# Altium PCB ESP32_Component.PcbDoc (part 1 of 2)
Units mm, origin at the board's own origin, x right, y up, seen from the top; angles counter-clockwise.
Board outline 90.17 x 95.89 mm, 4 copper layers (L1 (Signal), L2 (Ground), L3 (Ground), L4 (Signal)), stack 1.591 mm thick; 69 components, 61 nets, 348 pads, 1237 vias.
Unrouted connection lines stored in the file: 1.
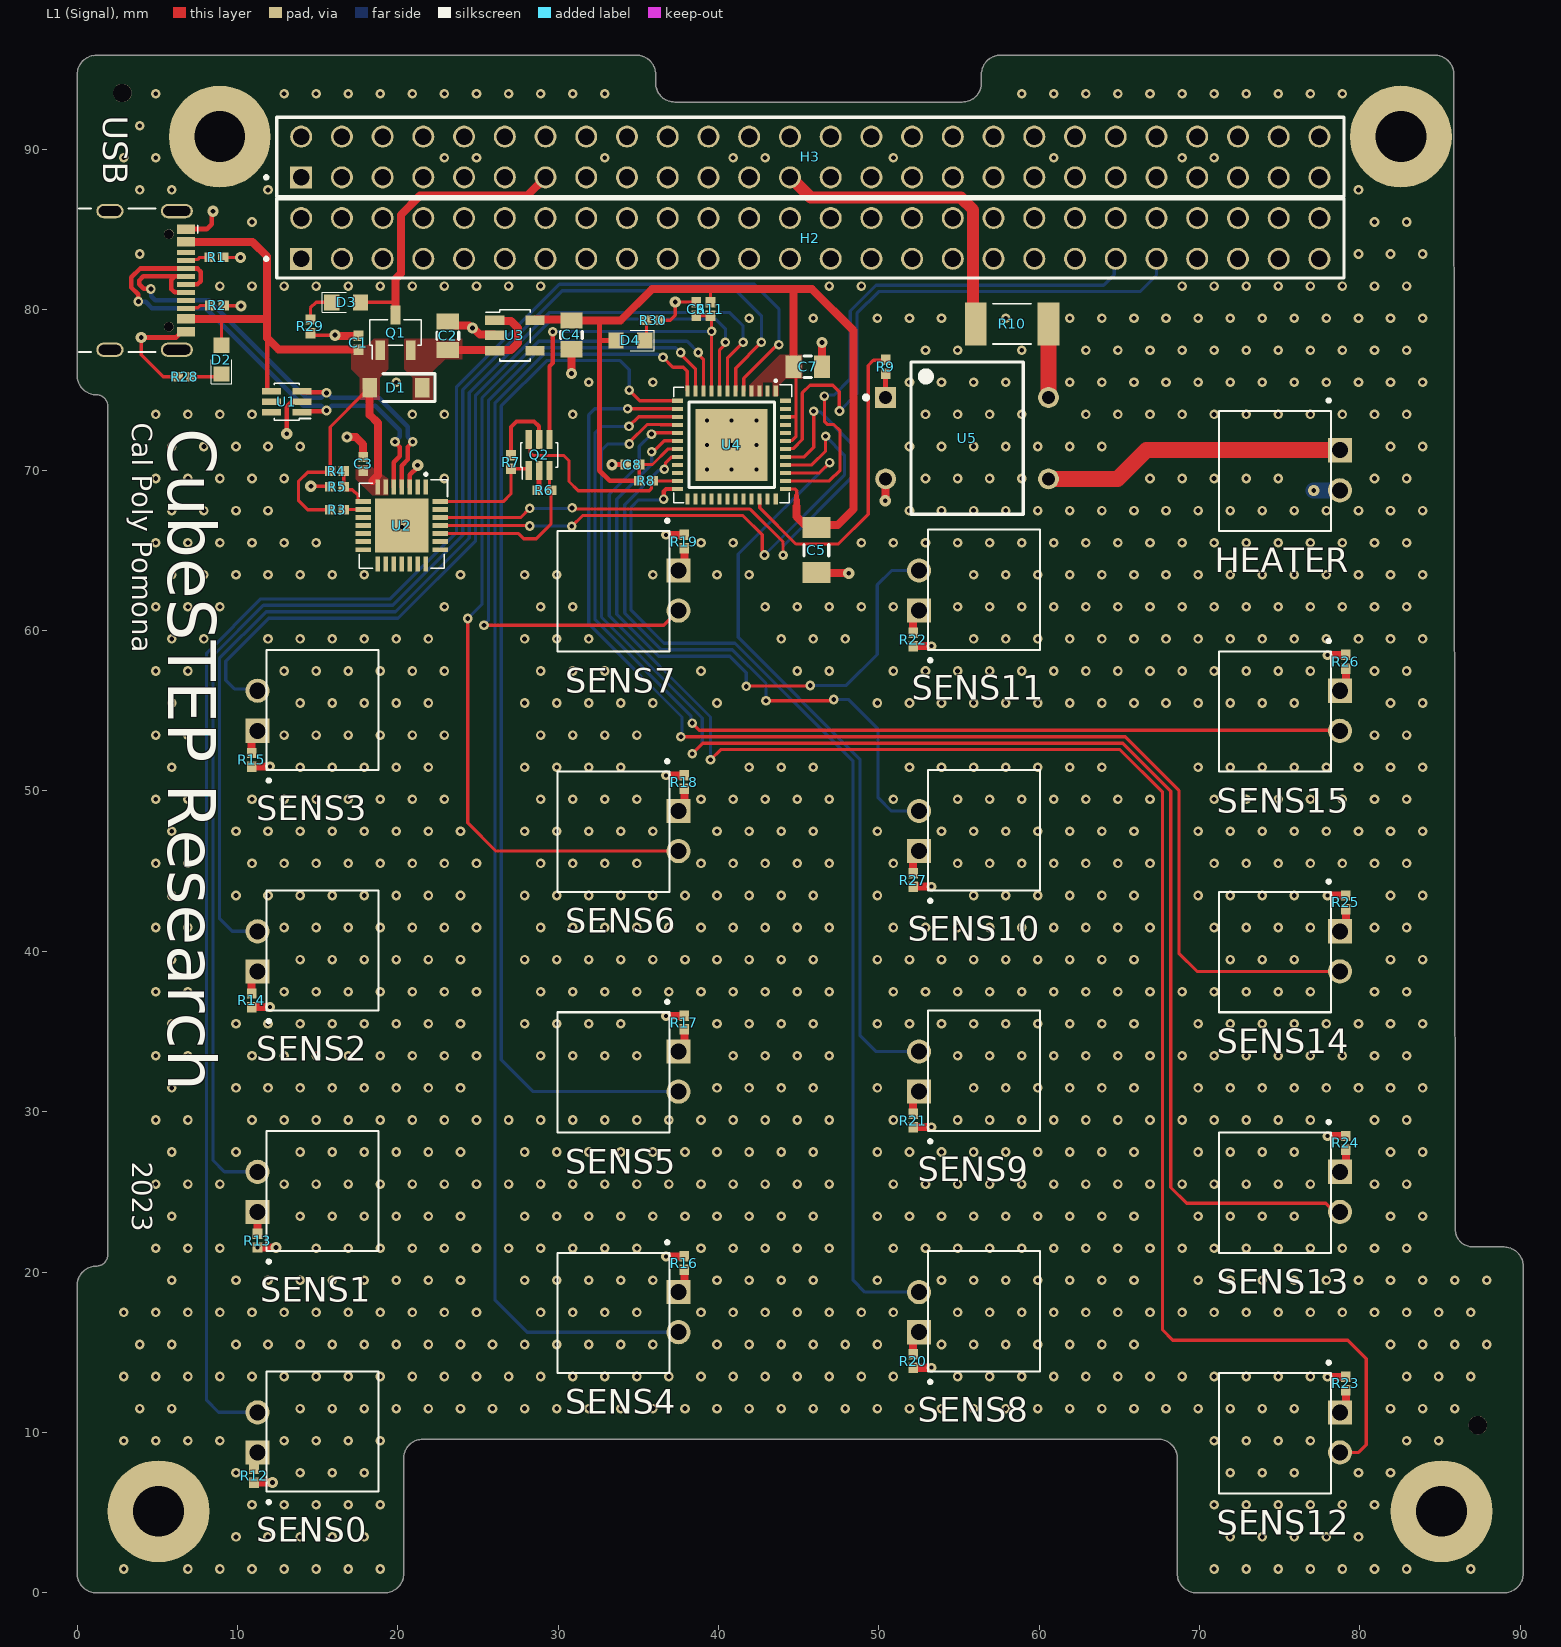
[diagram p0: L1 (Signal) view]
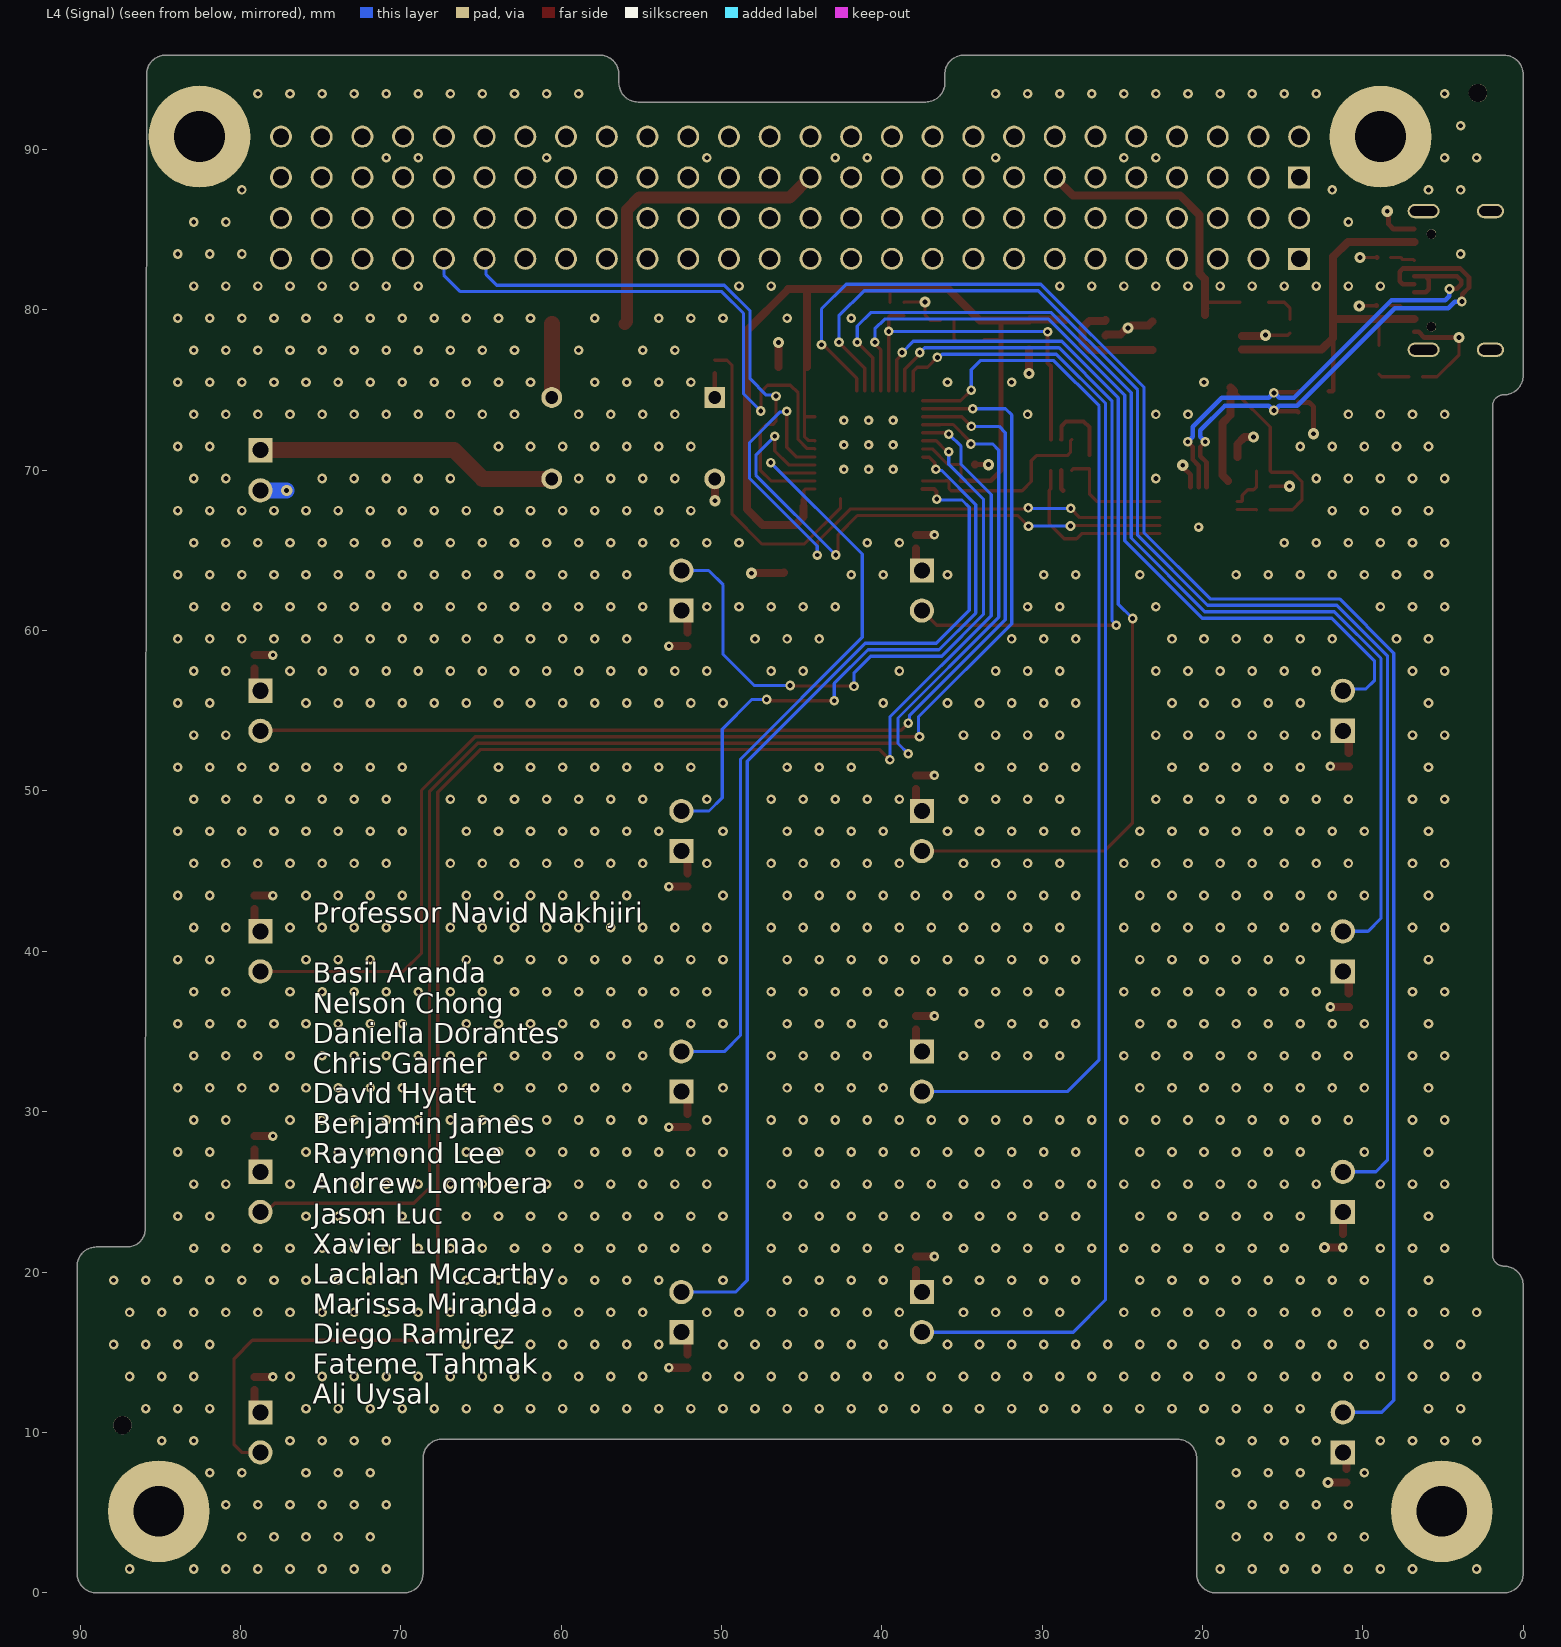
[diagram p1: L4 (Signal) view, seen from below]
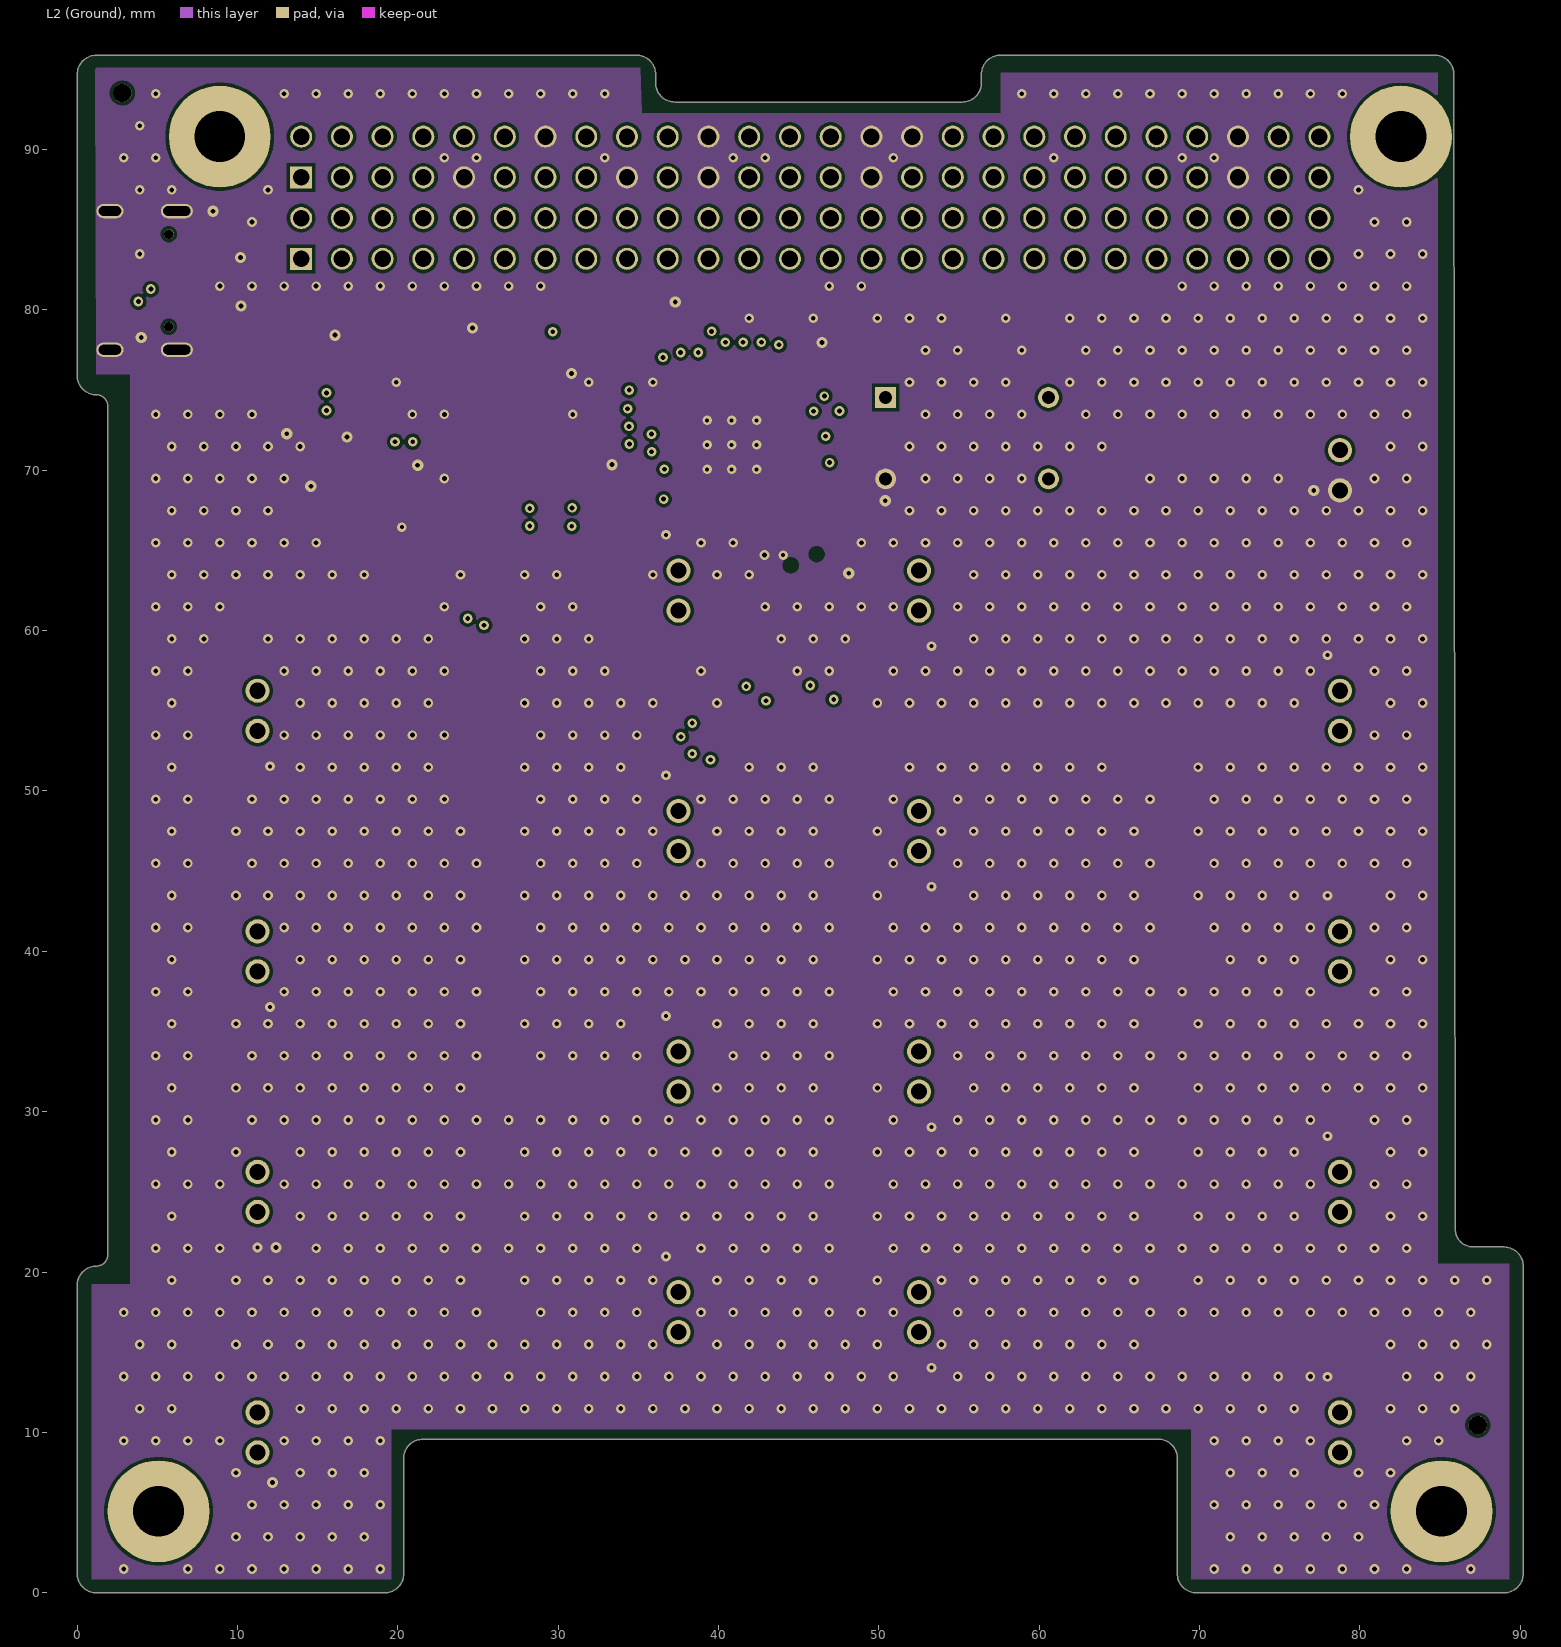
[diagram p2: L2 (Ground)]
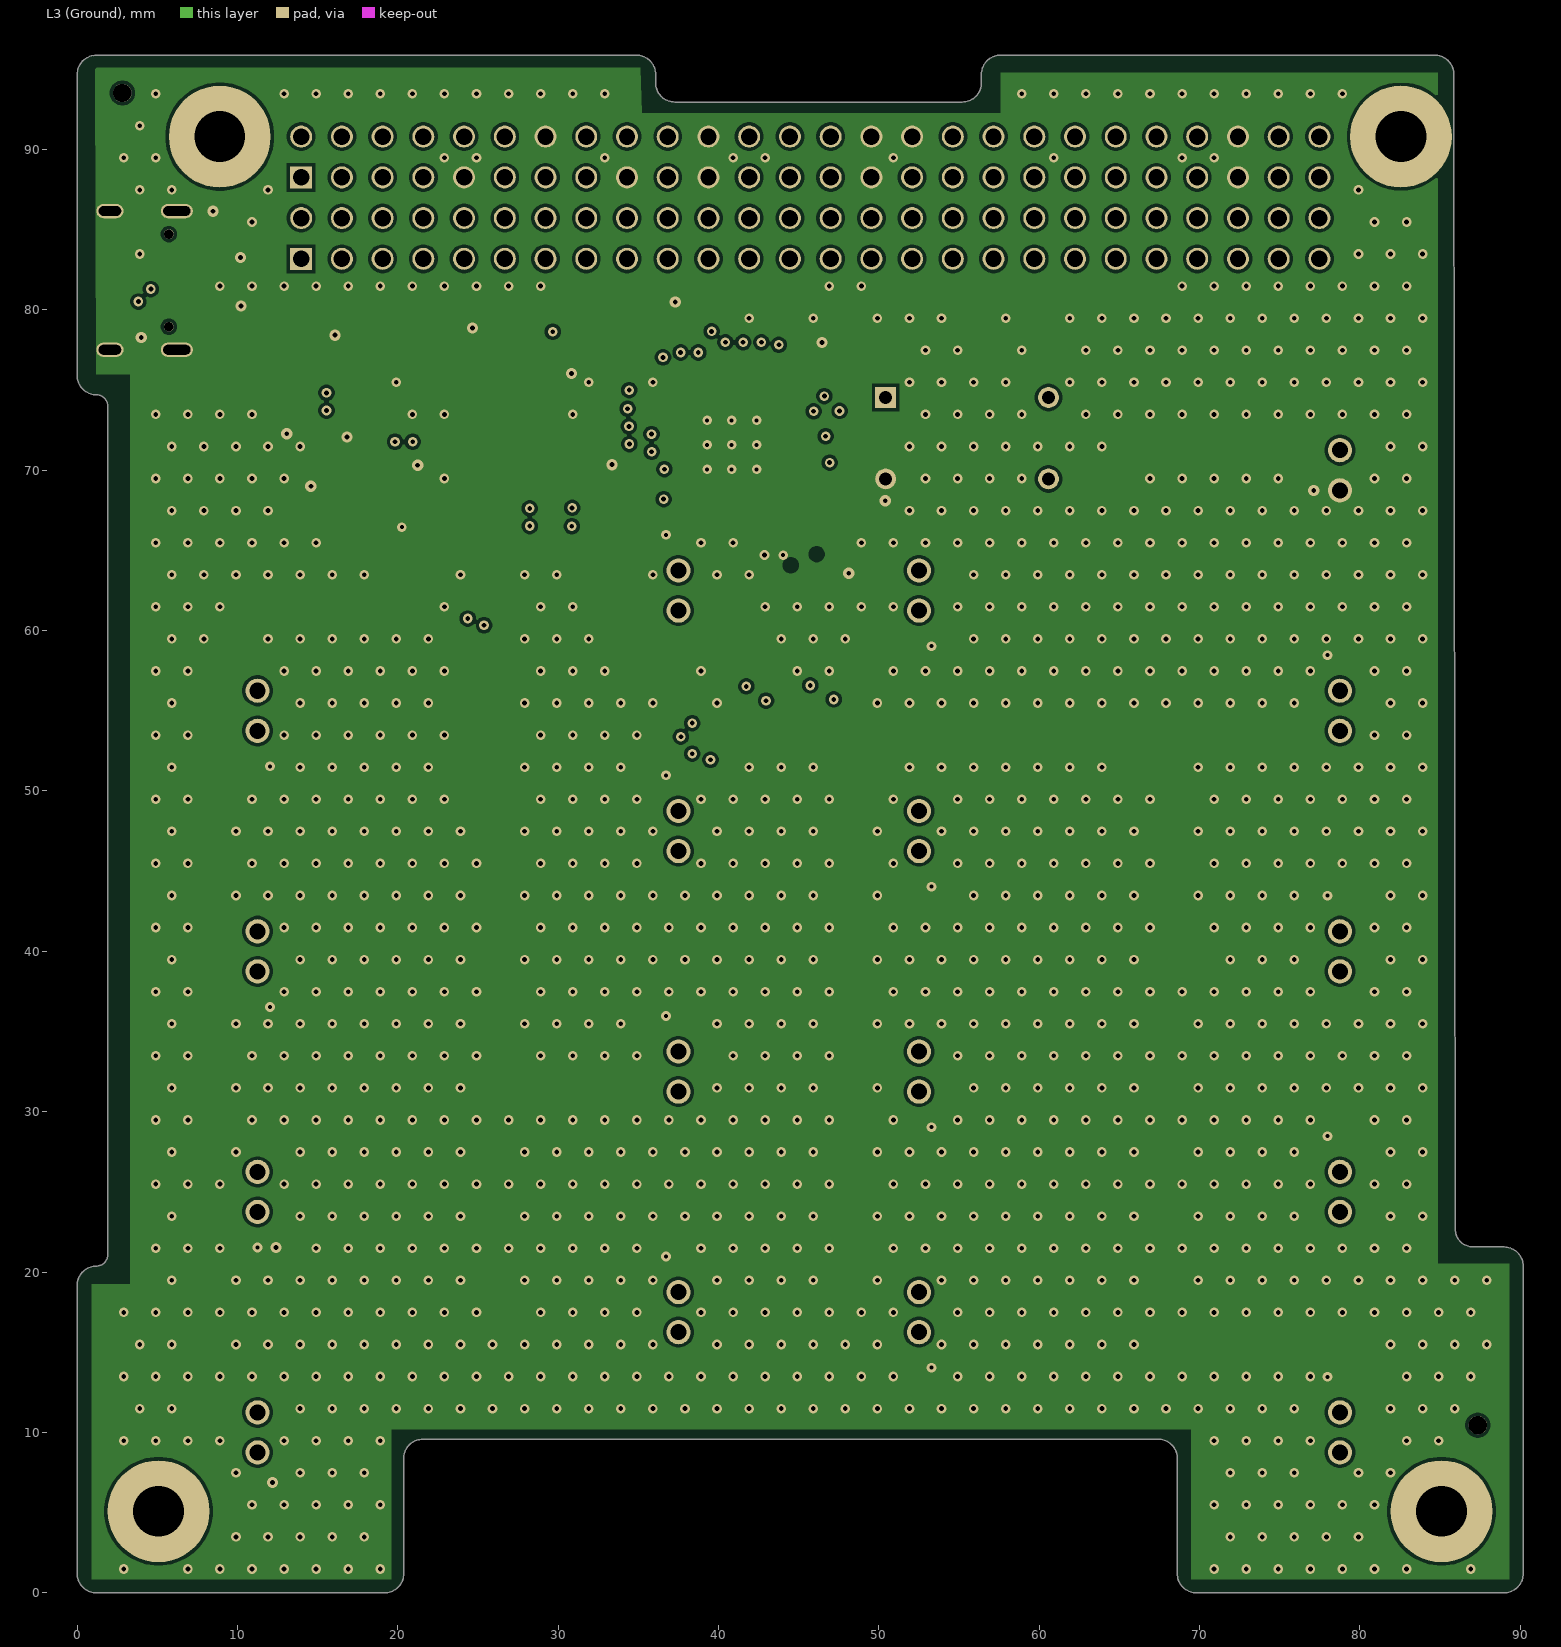
[diagram p3: L3 (Ground)]
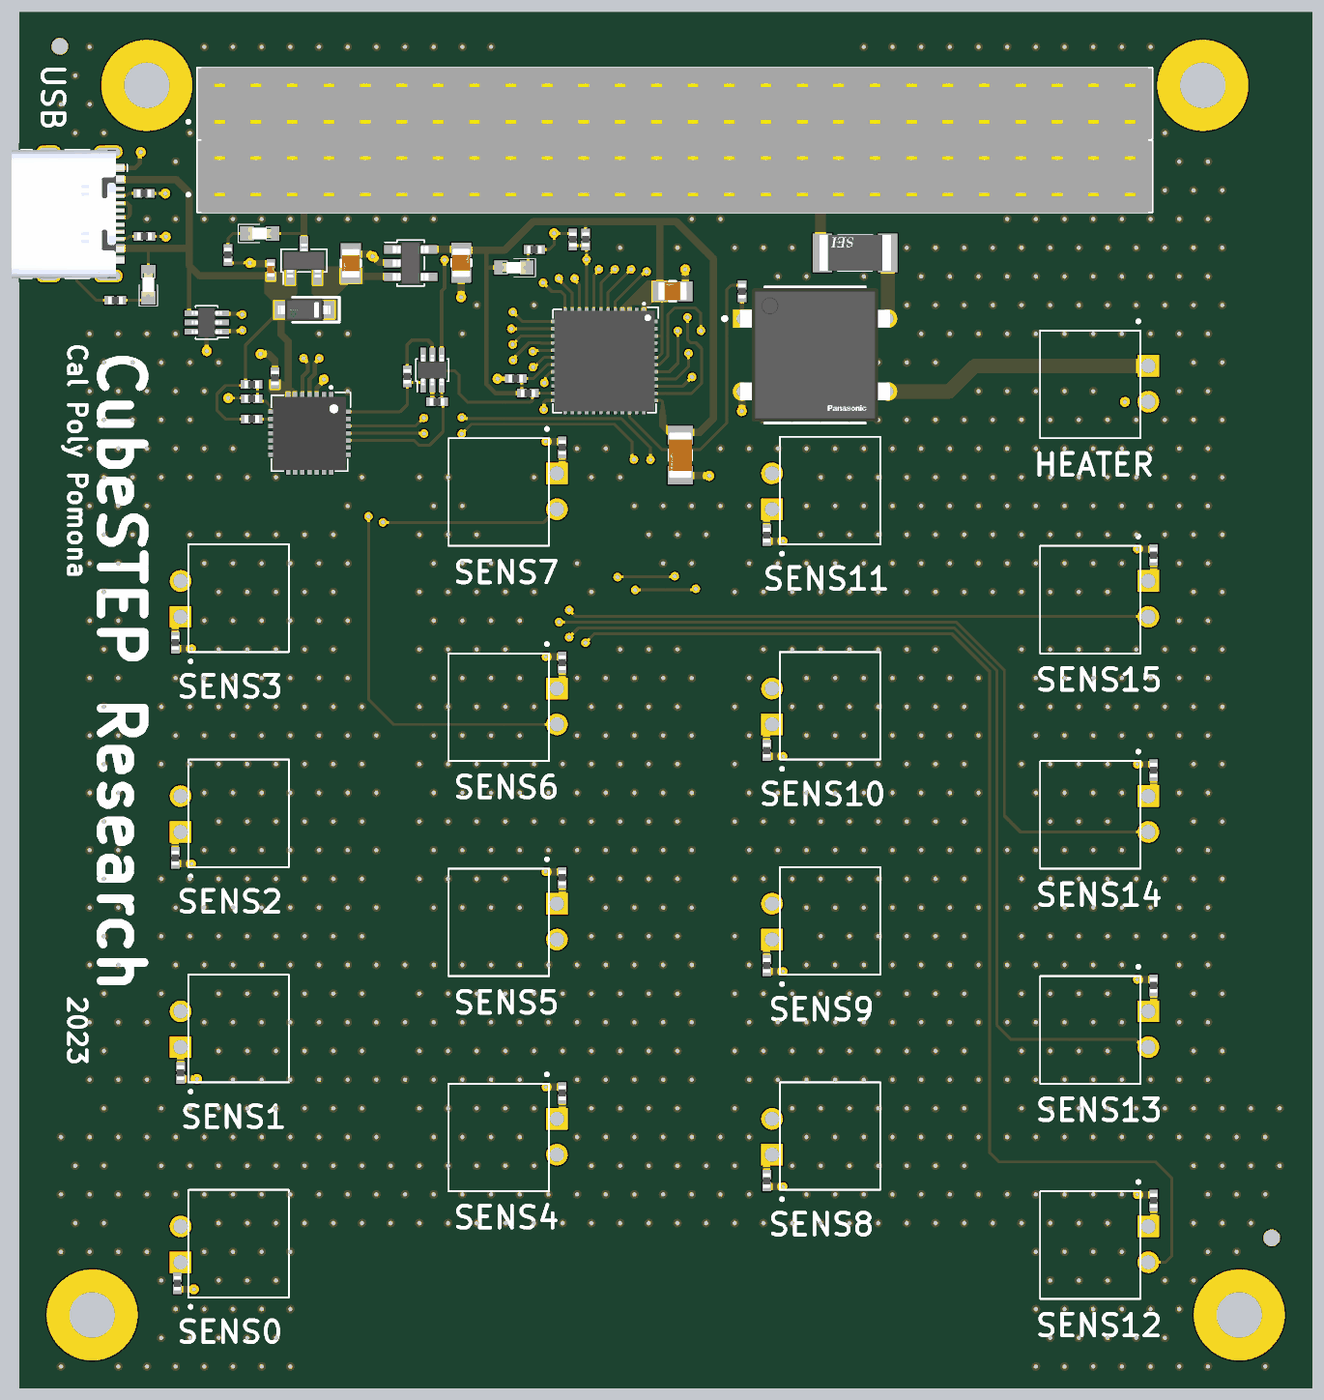
[diagram p5: 3D render of the assembled board from above, using the file's embedded part models]

## Layer stack, top to bottom
Top Solder: solder mask 0.0254, SM-001, Dk 4
L1 (Signal): signal copper 0.035
Dielectric 2: prepreg 0.2104, PP-017, Dk 4.4
L2 (Ground): signal copper 0.0175
Dielectric 3: core 1.065, Core-039, Dk 4.6
L3 (Ground): signal copper 0.0175
Dielectric 4: prepreg 0.2104, PP-017, Dk 4.4
L4 (Signal): signal copper 0.035
Bottom Solder: solder mask 0.0254, SM-001, Dk 4

## Board outline
68.608,1.189 68.608,8.382 ccw(c67.403,8.382) 67.403,9.586 21.551,9.564 ccw(c21.543,8.39) 20.369,8.382 20.369,1.189 cw(c19.177,1.189) 19.177,-0.003 1.199,-0.003 cw(c1.198,1.191) 0.005,1.191 0.005,19.17 cw(c1.208,19.17) 1.208,20.373 ccw(c1.208,21.075) 1.91,21.075 1.91,74.005 ccw(c1.209,74.005) 1.208,74.707 cw(c1.206,75.908) 0.005,75.91 0.005,94.689 cw(c1.199,94.689) 1.199,95.882 34.879,95.882 cw(c34.88,94.689) 36.073,94.689 36.073,94.155 ccw(c37.266,94.155) 37.267,92.961 55.199,92.961 ccw(c55.199,94.155) 56.393,94.155 56.393,94.689 cw(c57.587,94.689) 57.587,95.882 84.661,95.882 cw(c84.661,94.691) 85.852,94.691 85.942,22.671 ccw(c87.048,22.671) 87.048,21.565 88.983,21.565 cw(c88.983,20.373) 90.175,20.373 90.175,1.191 cw(c88.982,1.19) 88.981,-0.003 69.799,-0.003 cw(c69.799,1.189)

## Design rules (kind name [scope] priority, off if disabled: settings)
Clearance "Stitching GND" [IsStitchingVia and InNet('GND') vs (IsVia and (Not IsStitchingVia)) Or IsPad] p1: gap=0.4 ignorepadtopadclearanceinfootprint=FALSE
Clearance [All] p2: gap=0.2 ignorepadtopadclearanceinfootprint=FALSE except(0: Arc-Hole Track-Hole SMDPad-Hole THPad-Hole Via-Hole Fill-Hole Poly-Hole Region-Hole Text-Hole; 0.5: Via-Via)
ComponentClearance [All] p1 off: gap=0.254 collisioncheckmode=3 verticalgap=0.254 showdistances=TRUE
DiffPairsRouting [All] p1: maxlimit=0.254 minlimit=0.203 mostfreqgap=0.254 toplayer_maxgap=0.203 toplayer_prefgap=0.203 toplayer_minwidth=0.286 toplayer_maxwidth=0.286 toplayer_prefwidth=0.286 bottomlayer_maxgap=0.203 bottomlayer_prefgap=0.203 bottomlayer_minwidth=0.286 bottomlayer_maxwidth=0.286 bottomlayer_prefwidth=0.286 impedanceprofiledriven=TRUE impedanceprofileid={07B1589E-2D0E-415C-A5BA-9836D1CB054D} impedanceprofilevalue=90.000000 maxuncoupledlength=12.7
PolygonConnect [All] p1: connectstyle=Direct reliefconductorwidth=0.254 reliefentries=4 polygonreliefangle="90 Angle" airgapwidth=0.254
RoutingVias [All] p1: holewidth=0.3 width=0.7 viastyle="Through Hole" minholewidth=0.25 minwidth=0.55 maxholewidth=0.4 maxwidth=0.9
SolderMaskExpansion [All] p1: expansion=0.102 istentingtop=FALSE
UnRoutedNet [All] p1: checkbadconnections=TRUE
Width [All] p1: maxlimit=1 minlimit=0.2 preferedwidth=0.3 minimp=50.000000 maximp=50.000000 favimp=50.000000
27 further rules are at their usual default settings.

## Classes and differential pairs
differential pair Data: +Data_P -Data_N

## Components (designator, comment, footprint, x,y, rotation, side; value= is the part's Value field where it differs from the comment)
C1 "1uF" FP-GRM155-0_05-MFG 17.545,77.953 r90 top
C2 "10uF" FP-GRM21B-0_1-MFG 23.125,78.4 r270 top
C3 "4.7uF" TCC0402X5R104M160AT-Footprint-1 17.831,70.402 r90 top
C4 "10uF" FP-GRM21B-0_1-MFG 30.829,78.435 r90 top
C5 "100uF" CAPC3216X16N 46.101,65.021 r270 top
C6 "0.1uF" TCC0402X5R104M160AT-Footprint-1 38.608,80.054 r270 top
C7 "10uF" FP-GRM21B-0_1-MFG 45.563,76.452 r180 top
C8 "0.1uF" TCC0402X5R104M160AT-Footprint-1 34.627,70.358 r0 top
D1 "MBR0520" FP-425-04-MFG 19.882,75.159 r180 top
D2 "NCD0603R2" LED0603 9,76.9 r90 top
D3 "NCD0603R2" LED0603 16.775,80.475 r0 top
D4 "NCD0603R2" LED0603 34.5,78.1 r180 top
H2 "ESQ-126-39-G-D" ESQ-126-39-G-D-Footprint-1 45.72,84.455 r0 top
H3 "ESQ-126-39-G-D" ESQ-126-39-G-D-Footprint-1 45.72,89.535 r0 top
HEATER "XH 2.5 2P" W-2501R02P-N000-Footprint-1 78.75,70 r270 top (schematic designator H4)
Q1 "FDN340P" FDN340P-Footprint-1 19.856,78.588 r90 top
Q2 "BC847S" BC847S-Footprint-1 28.81,70.952 r90 top
R1 "5.1kΩ" RESC1005X04N 8.7,83.275 r180 top
R2 "5.1kΩ" RESC1005X04N 8.725,80.275 r180 top
R3 "4.7kΩ" RESC1005X04N 16.212,67.539 r180 top
R4 "22.1kΩ" RESC1005X04N 16.205,69.952 r180 top
R5 "47.5kΩ" RESC1005X04N 16.211,68.961 r0 top
R6 "10kΩ" RESC1005X04N 29.133,68.742 r0 top
R7 "10kΩ" RESC1005X04N 27.057,70.513 r270 top
R8 "10kΩ" RESC1005X04N 35.477,69.342 r180 top
R9 "2kΩ" RESC1005X04N 50.419,76.454 r270 top
R10 "1Ω" RESC5025X04N 58.304,79.121 r180 top
R11 "10kΩ" RESC1005X04N 39.497,80.054 r90 top
R12 "10kΩ" RESC1005X04N 11.03,7.294 r270 top
R13 "10kΩ" RESC1005X04N 11.25,21.957 r90 top
R14 "10kΩ" RESC1005X04N 10.88,36.944 r90 top
R15 "10kΩ" RESC1005X04N 10.88,51.944 r90 top
R16 "10kΩ" RESC1005X04N 37.87,20.556 r270 top
R17 "10kΩ" RESC1005X04N 37.87,35.556 r270 top
R18 "10kΩ" RESC1005X04N 37.87,50.556 r270 top
R19 "10kΩ" RESC1005X04N 37.87,65.556 r270 top
R20 "10kΩ" RESC1005X04N 52.13,14.444 r90 top
R21 "10kΩ" RESC1005X04N 52.13,29.444 r90 top
R22 "10kΩ" RESC1005X04N 52.13,59.444 r90 top
R23 "10kΩ" RESC1005X04N 79.12,13.056 r270 top
R24 "10kΩ" RESC1005X04N 79.12,28.056 r270 top
R25 "10kΩ" RESC1005X04N 79.12,43.056 r270 top
R26 "10kΩ" RESC1005X04N 79.12,58.056 r270 top
R27 "10kΩ" RESC1005X04N 52.13,44.444 r90 top
R28 "1kΩ" RESC1005X04N 6.7,75.825 r0 top
R29 "1kΩ" RESC1005X04N 14.55,78.975 r90 top
R30 "1kΩ" RESC1005X04N 35.925,79.35 r180 top
SENS0 "XH 2.5 2P" W-2501R02P-N000-Footprint-1 11.25,10 r90 top (schematic designator H5)
SENS1 "XH 2.5 2P" W-2501R02P-N000-Footprint-1 11.25,25 r90 top (schematic designator H6)
SENS2 "XH 2.5 2P" W-2501R02P-N000-Footprint-1 11.25,40 r90 top (schematic designator H7)
SENS3 "XH 2.5 2P" W-2501R02P-N000-Footprint-1 11.25,55 r90 top (schematic designator H8)
SENS4 "XH 2.5 2P" W-2501R02P-N000-Footprint-1 37.5,17.5 r270 top (schematic designator H9)
SENS5 "XH 2.5 2P" W-2501R02P-N000-Footprint-1 37.5,32.5 r270 top (schematic designator H10)
SENS6 "XH 2.5 2P" W-2501R02P-N000-Footprint-1 37.5,47.5 r270 top (schematic designator H11)
SENS7 "XH 2.5 2P" W-2501R02P-N000-Footprint-1 37.5,62.5 r270 top (schematic designator H12)
SENS8 "XH 2.5 2P" W-2501R02P-N000-Footprint-1 52.5,17.5 r90 top (schematic designator H13)
SENS9 "XH 2.5 2P" W-2501R02P-N000-Footprint-1 52.5,32.5 r90 top (schematic designator H14)
SENS10 "XH 2.5 2P" W-2501R02P-N000-Footprint-1 52.5,47.5 r90 top (schematic designator H15)
SENS11 "XH 2.5 2P" W-2501R02P-N000-Footprint-1 52.5,62.5 r90 top (schematic designator H16)
SENS12 "XH 2.5 2P" W-2501R02P-N000-Footprint-1 78.75,10 r270 top (schematic designator H17)
SENS13 "XH 2.5 2P" W-2501R02P-N000-Footprint-1 78.75,25 r270 top (schematic designator H18)
SENS14 "XH 2.5 2P" W-2501R02P-N000-Footprint-1 78.75,40 r270 top (schematic designator H19)
SENS15 "XH 2.5 2P" W-2501R02P-N000-Footprint-1 78.75,55 r270 top (schematic designator H20)
U1 "PESD5V0L5UY" PESD5V0L5UY-Footprint-1 13.075,74.275 r180 top
U2 "CP2102N" CP2102N-A02-GQFN28R-Footprint-1 20.244,66.548 r270 top
U3 "HT7833" HT7833-Footprint-1 27.298,78.41 r0 top
U4 "ESP32 Pico D4" ESP32-PICO-D4-Footprint-1 40.817,71.584 r270 top
U5 "AQY272" FP-AQY272-MFG 55.5,72 r0 top
USB "TYPE-C-31-M-12" TYPE-C-31-M-12-Footprint-1 4.42,81.839 r270 top (schematic designator H1)

## Footprints (in the part's own frame and the unit in brackets; to place one, negate y for a bottom-side part, rotate by r counter-clockwise, add the part's x,y. Pads: shape width x height; smd on the part's side, far side on the other; paste and mask are expansions set on the pad)
BC847S-Footprint-1 [mm]
  rect 1.19x0.4 smd: 1(-0.96,0.65) 2(-0.96,0) 3(-0.96,-0.65) 4(0.96,-0.65) 5(0.96,0) 6(0.96,0.65)
  silkscreen extent -1.5,-1.15 0.78,1.15, body extent -1.05,-1 1.05,1, height 1.1
CAPC3216X16N [mm] "Chip Capacitor, 2-Leads, Body 3.20x1.60mm, IPC Medium Density"
  rect 1.3x1.75 smd: 1(-1.4,0) 2(1.4,0)
  silkscreen extent -0.35,-0.77 0.35,0.77, body extent -2.42,-0.97 2.42,0.97, height 0.25
CP2102N-A02-GQFN28R-Footprint-1 [mm]
  rect 0.95x0.3 smd mask+0.05: 1(-2.4,1.5) 2(-2.4,1) 3(-2.4,0.5) 4(-2.4,0) 5(-2.4,-0.5) 6(-2.4,-1) 7(-2.4,-1.5) 15(2.4,-1.5) 16(2.4,-1) 17(2.4,-0.5) 18(2.4,0) 19(2.4,0.5) 20(2.4,1) 21(2.4,1.5)
  rect 0.3x0.95 smd mask+0.05: 8(-1.5,-2.4) 9(-1,-2.4) 10(-0.5,-2.4) 11(0,-2.4) 12(0.5,-2.4) 13(1,-2.4) 14(1.5,-2.4) 22(1.5,2.4) 23(1,2.4) 24(0.5,2.4) 25(0,2.4) 26(-0.5,2.4) 27(-1,2.4) 28(-1.5,2.4)
  rect 3.35x3.35 smd mask+0.05: 29(0,0)
  silkscreen extent -3.21,-2.65 2.65,2.85, body extent -2.55,-2.55 2.55,2.55, height 1
ESP32-PICO-D4-Footprint-1 [mm]
  rect 0.68x0.25 smd mask+0.05: 1(-3.365,2.75) 2(-3.365,2.25) 3(-3.365,1.75) 4(-3.365,1.25) 5(-3.365,0.75) 6(-3.365,0.25) 7(-3.365,-0.25) 8(-3.365,-0.75) 9(-3.365,-1.25) 10(-3.365,-1.75) 11(-3.365,-2.25) 12(-3.365,-2.75) 25(3.365,-2.75) 26(3.365,-2.25) 27(3.365,-1.75) 28(3.365,-1.25) 29(3.365,-0.75) 30(3.365,-0.25) 32(3.365,0.75) 33(3.365,1.25) 34(3.365,1.75) 35(3.365,2.25) 36(3.365,2.75)
  rect 0.25x0.68 smd mask+0.05: 13(-2.75,-3.365) 14(-2.25,-3.365) 15(-1.75,-3.365) 16(-1.25,-3.365) 17(-0.75,-3.365) 18(-0.25,-3.365) 19(0.25,-3.365) 20(0.75,-3.365) 21(1.25,-3.365) 22(1.75,-3.365) 23(2.25,-3.365) 24(2.75,-3.365) 37(2.75,3.365) 38(2.25,3.365) 39(1.75,3.365) 40(1.25,3.365) 41(0.75,3.365) 42(0.25,3.365) 43(-0.25,3.365) 44(-0.75,3.365) 45(-1.25,3.365) 46(-1.75,3.365) 47(-2.25,3.365) 48(-2.75,3.365)
  rrect5% 0.68x0.25 smd mask+0.05: 31(3.365,0.25)
  rect 4.5x4.5 smd: 49(0,0)
  silkscreen extent -4.01,-3.6 3.6,3.75, body extent -3.5,-3.5 3.5,3.5, height 1.05
ESQ-126-39-G-D-Footprint-1 [mm]
  rect 1.37x1.37 hole 1.02: 01(-31.75,-1.27)
  round 1.37 hole 1.02: 02(-31.75,1.27) 03(-29.21,-1.27) 04(-29.21,1.27) 05(-26.67,-1.27) 06(-26.67,1.27) 07(-24.13,-1.27) 08(-24.13,1.27) 09(-21.59,-1.27) 10(-21.59,1.27) 11(-19.05,-1.27) 12(-19.05,1.27) 13(-16.51,-1.27) 14(-16.51,1.27) 15(-13.97,-1.27) 16(-13.97,1.27) 17(-11.43,-1.27) 18(-11.43,1.27) 19(-8.89,-1.27) 20(-8.89,1.27) 21(-6.35,-1.27) 22(-6.35,1.27) 23(-3.81,-1.27) 24(-3.81,1.27) 25(-1.27,-1.27) 26(-1.27,1.27) 27(1.27,-1.27) 28(1.27,1.27) 29(3.81,-1.27) 30(3.81,1.27) 31(6.35,-1.27) 32(6.35,1.27) 33(8.89,-1.27) 34(8.89,1.27) 35(11.43,-1.27) 36(11.43,1.27) 37(13.97,-1.27) 38(13.97,1.27) 39(16.51,-1.27) 40(16.51,1.27) 41(19.05,-1.27) 42(19.05,1.27) 43(21.59,-1.27) 44(21.59,1.27) 45(24.13,-1.27) 46(24.13,1.27) 47(26.67,-1.27) 48(26.67,1.27) 49(29.21,-1.27) 50(29.21,1.27) 51(31.75,-1.27) 52(31.75,1.27)
  silkscreen extent -34.02,-2.47 33.28,2.47, body extent -33.27,-2.54 33.27,2.54, height 11.07
FDN340P-Footprint-1 [mm]
  rect 1.2x0.6 smd: 1(-1.1,0.95) 2(-1.1,-0.95) 3(1.1,0)
  silkscreen extent -1.65,-1.6 0.8,1.6, body extent -1.18,-1.46 1.18,1.46, height 1.12
FP-425-04-MFG [mil]
  rect 36x48 smd: 1(-64.5,0) 2(64.5,0)
  silkscreen extent -96,-34 32,34, body extent -86,-39 86,39, height 10
FP-AQY272-MFG [mm]
  rect 1.3x1.3 hole 0.8 paste-1000 mask+0: 1(-5.08,2.54)
  round 1.3 hole 0.8 paste-1000 mask+0: 2(-5.08,-2.54) 3(5.08,-2.54) 4(5.08,2.54)
  silkscreen extent -6.42,-4.75 3.5,4.75, body extent -5.83,-4.85 5.83,4.85, height 0.25
FP-GRM21B-0_1-MFG [mm]
  rect 1x1.4 smd: 1(-0.889,0) 2(0.889,0)
  silkscreen extent -0.23,-0.67 0.23,0.67, body extent -1.3,-0.77 1.3,0.77, height 0.25
FP-GRM155-0_05-MFG [mm]
  rect 0.65x0.6 smd: 1(-0.425,0) 2(0.425,0)
  body extent -0.7,-0.38 0.7,0.38, height 0.25
HT7833-Footprint-1 [mm]
  rect 1.21x0.59 smd: 1(-1.255,0.95) 2(-1.255,0) 3(-1.255,-0.95) 4(1.255,-0.95) 5(1.255,0.95)
  silkscreen extent -1.8,-1.6 0.95,1.6, body extent -1.25,-1.5 1.25,1.5, height 1.1
LED0603 [mm]
  rect 0.95x1 smd: 1(-0.9,0) 2(0.9,0)
  silkscreen extent -1.5,-0.64 0,0.64, body extent -0.8,-0.4 0.8,0.4, height 0.6
PESD5V0L5UY-Footprint-1 [mm]
  rect 1.19x0.4 smd: 1(-0.96,0.65) 2(-0.96,0) 3(-0.96,-0.65) 4(0.96,-0.65) 5(0.96,0) 6(0.96,0.65)
  silkscreen extent -1.5,-1.15 0.78,1.15, body extent -1.05,-1 1.05,1, height 1.1
RESC1005X04N [mm] "Chip Resistor, 2-Leads, Body 1.00x0.50mm, IPC Medium Density"
  rect 0.65x0.6 smd: 1(-0.425,0) 2(0.425,0)
  body extent -0.5,-0.25 0.5,0.25, height 0.4
RESC5025X04N [mm] "Chip Resistor, 2-Leads, Body 5.00x2.50mm, IPC Medium Density"
  rect 1.35x2.7 smd: 1(-2.275,0) 2(2.275,0)
  silkscreen extent -1.2,-1.25 1.2,1.25, body extent -3.65,-1.9 3.65,1.9, height 0.25
TCC0402X5R104M160AT-Footprint-1 [mm]
  rect 0.65x0.6 smd: 1(-0.425,0) 2(0.425,0)
  body extent -0.5,-0.27 0.5,0.28, height 0.5
TYPE-C-31-M-12-Footprint-1 [mm]
  rect 0.6x1.14 smd mask+0.05: A1_B12(-3.2,2.375) A4_B9(-2.4,2.375) B1_A12(3.2,2.375) B4_A9(2.4,2.375)
  rect 0.3x1.14 smd mask+0.05: A5(-1.25,2.375) A6(-0.25,2.375) A7(0.25,2.375) A8(1.25,2.375) B5(1.75,2.375) B6(0.75,2.375) B7(-0.75,2.375) B8(-1.75,2.375)
  oval 0.9x2 hole 0.6 slot 1.7 at 90 deg: S1(-4.325,1.795) S2(4.325,1.795)
  oval 0.9x1.7 hole 0.6 slot 1.4 at 90 deg: S3(-4.325,-2.375) S4(4.325,-2.375)
  round 0.6 hole 0.6 unplated: ""(-2.89,1.305) ""(2.89,1.305)
  silkscreen extent -4.47,-4.3 4.47,3.1, body extent -4.47,-4.97 4.47,2.93, height 3.31
W-2501R02P-N000-Footprint-1 [mm]
  rect 1.508x1.508 / inner round 1.508 / far side rect 1.508x1.508 hole 1: 1(-1.25,0)
  round 1.508 hole 1: 2(1.25,0)
  silkscreen extent -4.45,-7.55 3.8,-0.55, body extent -3.7,-7.55 3.8,-0.55, height 5.7

## Part data
C1: library part CMP-00014-3, "±10% 16V X5R SMD 0402", Manufacturer="Murata Electronics", Max Operating Temperature=85°C, Min Operating Temperature=-55°C, Overload Voltage=16V, Part Number=GRM155R61C105KA12D, Temperature Coefficient=X5R, Tolerance=±10%, Capacitance=1uF, ComponentLink1Description=JLCPCB, ComponentLink1URL=https://jlcpcb.com/partdetail/MurataElectronics-GRM155R61C105KA12D/C77006, Mount="Surface Mount", Size Code=0402, Type=Ceramic
C2 C4 C7: library part CMP-00013-3, "±10% 16V B SMD 0805", Manufacturer="Murata Electronics", Max Operating Temperature=85°C, Min Operating Temperature=-25°C, Overload Voltage=16V, Part Number=GRM21BB31C106KE15L, Temperature Coefficient=B, Tolerance=±10%, Capacitance=10uF, ComponentLink1Description=JLCPCB, ComponentLink1URL=https://jlcpcb.com/partdetail/173698-GRM21BB31C106KE15L/C162317, Mount="Surface Mount", Size Code=0805, Type=Ceramic
C3: library part CMP-00010-8, "±20% 16V X5R SMD 0402", Manufacturer=--, Max Operating Temperature=85°C, Min Operating Temperature=-55°C, Overload Voltage=16V, Part Number=CM05X5R475M16AH, Temperature Coefficient=X5R, Tolerance=±20%, Capacitance=4.7uF, ComponentLink1Description=JLCPCB, ComponentLink1URL=https://jlcpcb.com/partdetail/-CM05X5R475M16AH/C255498, Mount="Surface Mount", Size Code=0402, Type=Ceramic
C5: library part CMP-00012-3, "±20% 6.3V X5R SMD 1206", Manufacturer="Taiyo Yuden", Max Operating Temperature=85°C, Min Operating Temperature=-55°C, Overload Voltage=6.3V, Part Number=JMK316BJ107ML-T, Temperature Coefficient=X5R, Tolerance=±20%, Capacitance=100uF, ComponentLink1Description=JLCPCB, ComponentLink1URL=https://jlcpcb.com/partdetail/TaiyoYuden-JMK316BJ107MLT/C87164, Mount="Surface Mount", Size Code=1206, Type=Ceramic
C6 C8: library part CMP-00011-4, "±20% 16V X5R SMD 0402", Manufacturer=CCTC, Max Operating Temperature=85°C, Min Operating Temperature=-55°C, Overload Voltage=16V, Part Number=TCC0402X5R104M160AT, Temperature Coefficient=X5R, Tolerance=±20%, Capacitance=0.1uF, ComponentLink1Description=JLCPCB, ComponentLink1URL=https://jlcpcb.com/partdetail/Cctc-TCC0402X5R104M160AT/C344190, Mount="Surface Mount", Size Code=0402, Type=Ceramic
D1: library part CMP-00018-4, "Rectifier Diode, Schottky, 1 Phase, 1 Element, 0.5A, 20V V(RRM), Silicon", Forward Voltage-Max (VF)=385mV, Max Operating Temperature=125°C, Max Output Current=500mA, Min Operating Temperature=-65°C, Non-rep Pk Forward Current-Max=5.5A, Package Body Material=Plastic, Package Shape=Rectangular, Package Style="SMALL OUTLINEMeter", Peak Reflow Temperature (Cel)=260°C, Rep Pk Reverse Voltage-Max=20V, Time @ Peak Reflow Temperature-Max (s)=30s, Additional Feature="FREE WHEELING DIODE", Diode Element Material=SILICON, Diode Type=RECTIFIER, JESD-30 Code=R-PDSO-G2, JESD-609 Code=e3, Moisture Sensitivity Level=1, Number of Elements=1, Number of Pins=2, Qualification Status="Not Qualified", Reach SVHC Compliant=Yes, RoHS Compliant=Yes, Surface Mount=Yes, Technology=SCHOTTKY, Terminal Finish=Tin, Terminal Form="Gull Wing", Terminal Position=DUAL
D2 D3 D4: library part CMP-00019-4, "Colorless transparence 65mcd~150mcd 615nm~630nm -30℃~+85℃ Red 130° 65mW 0603 Light Emitting Diodes (LED) ROHS", Emitted Color=Red, Forward Current=20mA, Forward Voltage (VF)=1.6V~2.6V, Lens Color="Colorless transparence", Operating Temperature=-30℃~+85℃, Power Dissipation=65mW, Dominant Wavelength=615nm~630nm, Lumunous Intensity=65mcd~150mcd, Viewing Angle=130°
H2 H3: library part CMP-00000-2, "Board Connector, 52 Contact(s), 2 Row(s), Female, Straight, 0.1 inch Pitch, Solder Terminal, Locking, Black Insulator, Socket", Contact Resistance=10mR, Insulation Color=Black, Max Operating Temperature=125°C, Min Operating Temperature=-55°C, Rated Current (Signal)=5.7A, Body Breadth=0.195inch, Body Depth=0.435inch, Body Length=2.62inch, Body/Shell Style=SOCKET, Connector Type="BOARD CONNECTOR", Contact Finish - Mating="GOLD (20) OVER NICKEL (50)", Contact Finish - Termination="Gold (Au) - with Nickel (Ni) barrier", Contact Gender=Female, Contact Material=Bronze, Contact Pattern=RECTANGULAR, Contact Style="SQ PIN-SKT", DIN Conformance=No, Filter Feature=No, IEC Conformance=No, Insulation Material=Thermoplastic, JESD-609 Code=e4, Mating Contact Pitch=0.1inch, Mating Contact Row Spacing=0.1inch, Mating Information="MULTIPLE MATING PARTS AVAILABLE", MIL Conformance=No, Mixed Contacts=No, Mount=Board, Mounting Option 1=LOCKING, Mounting Style=STRAIGHT, Number Of Connectors=1, Number of Contacts=52, Number Of PCB Rows=2, Number of Rows Loaded=2, Option="General Purpose", PCB Contact Pattern=RECTANGULAR, PCB Contact Row Spacing=2.54mm, Plating Thickness=20uin, Polarization Key="POLARIZED HOUSING", Reach SVHC Compliant=Yes, Reference Standard=UL, Reliability=COMMERCIAL, RoHS Compliant=Yes, Terminal Length=0.48inch, Terminal Pitch=2.54mm, Termination=Solder
HEATER SENS0 SENS1 SENS2 SENS3 SENS4 SENS5 SENS6 SENS7 SENS8 SENS9 SENS10 SENS11 SENS12 SENS13 SENS14 SENS15: library part CMP-00005-2, "1x2P XH 1 2.5mm 2 Brass Push-Pull,P=2.5mm Wire To Board / Wire To Wire Connector ROHS", Manufacturer="Ckmtw(Shenzhen Cankemeng)", Package=Push-Pull,P=2.5mm, Assembly="Wave Soldering"
Q1: library part CMP-00008-2, "SOT-23 MOSFETs ROHS", Drain Current-Max (Abs) (ID)=2A, Drain-source On Resistance-Max=70R, DS Breakdown Voltage-Min=20V, Max Operating Temperature=150°C, Operating Mode="ENHANCEMENT MODE", Package Body Material=Plastic, Package Shape=Rectangular, Package Style="SMALL OUTLINEMeter", Power Dissipation-Max (Abs)=500mW, Drain Current-Max (ID)=2A, FET Technology="METAL-OXIDE SEMICONDUCTOR", JESD-30 Code=R-PDSO-G3, JESD-609 Code=e3, Moisture Sensitivity Level=1, Number of Elements=1, Number of Pins=3, Polarity/Channel Type=P-CHANNEL, Qualification Status="Not Qualified", Reach SVHC Compliant=Yes, RoHS Compliant=Yes, Surface Mount=Yes, Terminal Finish=Tin, Terminal Form="Gull Wing", Terminal Position=DUAL, Transistor Application=SWITCHING, Transistor Element Material=SILICON
Q2: library part CMP-00009-2, "Small Signal Bipolar Transistor, 0.1A I(C), 45V V(BR)CEO, 2-Element, NPN, Silicon", Collector-emitter Voltage-Max=45V, DC Current Gain-Min (hFE)=200, Max Collector Current=100mA, Max Operating Temperature=150°C, Package Body Material=Plastic, Package Shape=Rectangular, Package Style="SMALL OUTLINEMeter", Transition Frequency-Nom (fT)=250MHz, JESD-30 Code=R-PDSO-G6, Moisture Sensitivity Level=1, Number of Elements=2, Number of Pins=6, Polarity/Channel Type=NPN, Qualification Status="Not Qualified", Reach SVHC Compliant=Yes, RoHS Compliant=Yes, Surface Mount=Yes, Terminal Form="Gull Wing", Terminal Position=DUAL, Transistor Application=AMPLIFIER, Transistor Element Material=SILICON
R1 R2: library part CMP-00031-12, "±0.5% 62.5mW 50V SMD 0402", Manufacturer="UNI-ROYAL(Uniroyal Elec)", Max Operating Temperature=155°C, Min Operating Temperature=-55°C, Overload Voltage=50V, Part Number=0402WGD5101TCE, Power=62.5mW, Resistor Type=Fixed, Temperature Coefficient=±100ppm/°C, Tolerance=±0.5%, ComponentLink1Description=JLCPCB, ComponentLink1URL=https://jlcpcb.com/partdetail/416226-0402WGD5101TCE/C423276, Mount="Surface Mount", Resistance=5.1kΩ, Size Code=0402, Type="Thick Film"
R3: library part CMP-00024-11, "±1% 62.5mW 50V SMD 0402", Manufacturer=YAGEO, Max Operating Temperature=155°C, Min Operating Temperature=-55°C, Overload Voltage=50V, Part Number=RC0402FR-074K7L, Power=62.5mW, Resistor Type=Fixed, Temperature Coefficient=±100ppm/°C, Tolerance=±1%, ComponentLink1Description=JLCPCB, ComponentLink1URL=https://jlcpcb.com/partdetail/Yageo-RC0402FR074K7L/C105871, Mount="Surface Mount", Resistance=4.7kΩ, Size Code=0402, Type="Thick Film"
R4: library part CMP-00022-11, "±1% 62.5mW50V SMD 0402", Manufacturer=YAGEO, Max Operating Temperature=155°C, Min Operating Temperature=-55°C, Overload Voltage=50V, Part Number=RC0402FR-0722K1L, Power=62.5mW, Resistor Type=Fixed, Temperature Coefficient=±100ppm/°C, Tolerance=±1%, ComponentLink1Description=JLCPCB, ComponentLink1URL=https://jlcpcb.com/partdetail/Yageo-RC0402FR0722K1L/C163478, Mount="Surface Mount", Resistance=22.1kΩ, Size Code=0402, Type="Thick Film"
R5: library part CMP-00029-10, "±1% 62.5mW 50V SMD 0402", Manufacturer=YAGEO, Max Operating Temperature=155°C, Min Operating Temperature=-55°C, Overload Voltage=50V, Part Number=RC0402FR-0747K5L, Power=62.5mW, Resistor Type=Fixed, Temperature Coefficient=±100ppm/°C, Tolerance=±1%, ComponentLink1Description=JLCPCB, ComponentLink1URL=https://jlcpcb.com/partdetail/Yageo-RC0402FR0747K5L/C137974, Mount="Surface Mount", Resistance=47.5kΩ, Size Code=0402, Type="Thick Film"
R6 R7 R8 R11 R12 R13 R14 R15 R16 R17 R18 R19 R20 R21 R22 R23 R24 R25 R26 R27: library part CMP-00021-11, "±1% 62.5mW 50V SMD 0402", Manufacturer="FH (Guangdong Fenghua Advanced Tech)", Max Operating Temperature=155°C, Min Operating Temperature=-55°C, Overload Voltage=50V, Part Number=RC-02W1002FT, Power=62.5mW, Resistor Type=Fixed, Temperature Coefficient=±200ppm/℃, Tolerance=±1%, ComponentLink1Description=JLCPCB, ComponentLink1URL=https://jlcpcb.com/partdetail/251116-RC02W1002FT/C258091, Mount="Surface Mount", Resistance=10kΩ, Size Code=0402, Type="Thick Film"
R9: library part CMP-00027-11, "±1% 62.5mW 50V SMD 0402", Manufacturer="LIZ Elec", Max Operating Temperature=125°C, Min Operating Temperature=-55°C, Overload Voltage=50V, Part Number=CR0402FF2001G, Power=62.5mW, Resistor Type=Fixed, Temperature Coefficient=±200ppm/℃, Tolerance=±1%, ComponentLink1Description=JLCPCB, ComponentLink1URL=https://jlcpcb.com/partdetail/LizElec-CR0402FF2001G/C100291, Mount="Surface Mount", Resistance=2kΩ, Size Code=0402, Type="Thick Film"
R10: library part CMP-00017-8, "±5% 0.75W 200V SMD 2010", Manufacturer=RALEC, Max Operating Temperatrure=155°C, Min Operating Temperature=-55°C, Overload Voltage=200V, Part Number=RTT201R00FTE, Power=750mW, Resistor Type=Fixed, Temperature Coefficient=±400ppm/°C, Tolerance=±5%, ComponentLink1Description=JLCPCB, ComponentLink1URL=https://jlcpcb.com/partdetail/Ralec-RTT201R00FTE/C159258, Mount="Surface Mount", Resistance=1Ω, Size Code=2010, Type="Thick Film"
R28 R29 R30: library part CMP-00025-11, "±1% 62.5mW 50V SMD 0402", Manufacturer=YAGEO, Max Operating Temperature=155°C, Min Operating Temperature=-55°C, Overload Voltage=50V, Part Number=RC0402FR-071KL, Power=62.5mW, Resistor Type=Fixed, Temperature Coefficient=±100ppm/°C, Tolerance=±1%, ComponentLink1Description=JLCPCB, ComponentLink1URL=https://jlcpcb.com/partdetail/Yageo-RC0402FR071KL/C106235, Mount="Surface Mount", Resistance=1kΩ, Size Code=0402, Type="Thick Film"
U1: library part CMP-00004-3, "Trans Voltage Suppressor Diode, 25W, 5V V(RWM), Unidirectional, 5 Element, Silicon", Manufacturer="UMW(Youtai Semiconductor Co., Ltd.)", ComponentLink1Description=JLCPCB, ComponentLink1URL=https://jlcpcb.com/partdetail/2985836-PESD5V0L5UY/C2831528, Part Number=PESD5V0L5UY
U2: library part CMP-00002-7, "USB-to-UART bridge controller", Manufacturer="SILICON LABS", Part Number=CP2102N-A02-GQFN28R, ComponentLink1Description=JLCPCB, ComponentLink1URL=https://jlcpcb.com/partdetail/SiliconLabs-CP2102N_A02GQFN28R/C964632
U3: library part CMP-00007-3, "SOT-23-5 Linear Voltage Regulators (LDO) ROHS", Manufacturer="TECH PUBLIC", ComponentLink1Description=JLCPCB, ComponentLink1URL=https://jlcpcb.com/partdetail/TECHPUBLIC-HT7833/C3011187, Part Number=HT7833
U4: library part CMP-00001-5, "System-on-Chip integrating an ESP32 chip together with a 4 MB SPI flash", Manufacturer="Espressif Systems", Part Number=ESP32-PICO-D4, ComponentLink1Description=JLCPCB, ComponentLink1URL=https://jlcpcb.com/partdetail/EspressifSystems-ESP32_PICOD4/C193707
U5: library part CMP-00016-2, "Solid State Relays 1.25V 60V 0.11Ω 2A AC,DC DIP-4 - MOS Output (PhotoMOS) ROHS 1 Form A(SPST-NO)", Control Current=1mA, Control Voltage=1.16V, Forward Current-Max=50mA, Isolation Voltage-Max=2.5kV, Max Operating Temperature=85°C, Min Operating Temperature=-40°C, On-State Current-Max=2A, On-state Resistance-Max=180mR, Input Type=DC, JESD-609 Code=e3, Length=9.3mm, Number of Elements=1, Optoelectronic Device Type="TRANSISTOR OUTPUT SSR", Output Circuit Type=MOSFET, Overall Height=3.9mm, Reach SVHC Compliant=Yes, RoHS Compliant=Yes, Terminal Finish=Tin
USB: library part CMP-00003-6, "5A 1 16P Female Type-C SMD USB Connectors ROHS"

## Free pads (board coordinates)
  round 6.35 hole 3.175 mask+0.102: PTH(8.895,90.802) PTH(82.55,90.805) PTH(85.09,5.08) PTH3(5.08,5.08)
  round 1.152 hole 1.152 mask+0.102: TH(2.825,93.525) TH(87.35,10.45)

## Via types
v1: diameter 0.6, hole 0.3, L1 (Signal) to L4 (Signal), tented both sides, 1149 vias
v2: diameter 0.6, hole 0.3, L1 (Signal) to L4 (Signal), 43 vias
v3: diameter 0.6, hole 0.25, L1 (Signal) to L4 (Signal), 26 vias
v4: diameter 0.7, hole 0.3, L1 (Signal) to L4 (Signal), 19 vias

## Nets (pads, with @x,y where several pads share a name; then routed paths per layer and width w, separated by ;. In a path a pad name is that pad's centre, name@x,y a point inside that pad or via, vN(x,y) a via of type N, cw(c..) or ccw(c..) an arc to the next point about the centre after c; other vN are vias at no path point)
3V3: C4.2 C5.1 C7.2 C8.2 D4.2 R8.2 R11.2 U3.5 U4.1 U4.3 U4.4 U4.19 U4.37 U4.43 U4.46 | length 67.8
  L1 (Signal) w0.2: R8.2@35.052,69.342 C8.2@35.052,70.358 35.879,70.358 36.855,71.334 U4.19@37.452,71.334 ; R11.2@39.497,80.479 39.497,81.287 ; U4.37@44.182,68.834 44.753,68.834 44.87,68.717 44.87,68.43 ; U4.43@44.182,71.834 44.207,71.859 44.596,71.859 44.822,72.085 44.822,73.35 ; U4.46@44.182,73.334 44.806,73.334 44.822,73.35 ; C7.2@44.674,76.452 44.822,76.304 44.822,73.35
  L1 (Signal) w0.3: 32.575,79.324 32.575,78.1 ; D4.2@33.6,78.1 32.575,78.1 ; R8.2@35.052,69.342 33.209,69.342 32.575,69.976 32.575,78.1 ; 44.87,68.12 44.87,68.43
  L1 (Signal) w0.4: 44.87,67.75 44.87,68.12
  L1 (Signal) w0.5: U3.5@28.553,79.36 28.584,79.39 30.763,79.39 C4.2@30.829,79.324 32.575,79.324 33.874,79.324 35.84,81.29 39.5,81.29 ; 39.497,81.287 39.5,81.29 ; C7.2@44.674,76.452 44.674,81.266 44.65,81.29 ; 44.87,67.75 44.87,67.114 45.391,66.593 47.433,66.593 48.41,67.57 48.41,78.715 45.835,81.29 44.65,81.29 ; 39.5,81.29 44.65,81.29
5V: H3.25 R10.2 | length 19.4
  L1 (Signal) w0.75: H3.25@44.45,88.265 44.49,88.265 45.75,87.005 55.112,87.005 55.88,86.237 55.88,79.27 R10.2@56.029,79.121
ADC1_0: SENS0.2 U4.5 | length 107.3
  L1 (Signal) w0.2: U4.5@41.567,74.949 41.567,75.73 43.659,77.822 v2(43.761,77.822)
  L4 (Signal) w0.2: SENS0.2@11.25,11.25 8.816,11.25 8.071,11.995 8.071,58.598 11.453,61.98 19.523,61.98 23.65,66.107 23.65,75.175 30.075,81.6 42.225,81.6 43.761,80.064 v2(43.761,77.822)
ADC1_1: SENS1.2 U4.6 | length 89.5
  L1 (Signal) w0.2: U4.6@41.067,74.949 41.067,76.373 v2(42.672,77.978)
  L4 (Signal) w0.2: SENS1.2@11.25,26.25 9.183,26.25 8.471,26.962 8.471,58.432 11.619,61.58 19.689,61.58 24.05,65.941 24.05,75.009 30.241,81.2 41.101,81.2 42.672,79.629 v2(42.672,77.978)
ADC1_2: SENS2.2 U4.7 | length 70.6
  L1 (Signal) w0.2: U4.7@40.567,74.949 40.567,77.016 v2(41.529,77.978)
  L4 (Signal) w0.2: SENS2.2@11.25,41.25 9.677,41.25 8.871,42.056 8.871,58.267 11.784,61.18 19.854,61.18 24.45,65.776 24.45,74.844 29.436,79.83 40.693,79.83 41.529,78.994 v2(41.529,77.978)
ADC1_3: SENS3.2 U4.8 | length 53
  L1 (Signal) w0.2: U4.8@40.067,74.949 40.067,77.507 40.429,77.87 v2(40.429,77.978)
  L4 (Signal) w0.2: SENS3.2@11.25,56.25 11.138,56.362 9.805,56.362 9.271,56.896 9.271,58.101 11.94,60.77 20.01,60.77 24.85,65.61 24.85,74.678 29.597,79.425 39.828,79.425 40.429,78.824 v2(40.429,77.978)
ADC1_4: SENS4.2 U4.12 | length 83.1
  L1 (Signal) w0.2: v2(36.535,77.04) 37.15,76.425 37.8,76.425 38.042,76.183 38.042,74.974 U4.12@38.067,74.949
  L4 (Signal) w0.2: v2(36.535,77.04) 36.427,77.04 36.227,77.24 29.109,77.24 26.05,74.181 26.05,18.26 28.06,16.25 SENS4.2@37.5,16.25
ADC1_5: SENS5.2 U4.13 | length 66.6
  L1 (Signal) w0.2: v2(34.425,75) 35.091,74.334 U4.13@37.452,74.334
  L4 (Signal) w0.2: v2(34.425,75) 34.425,76.275 33.86,76.84 29.275,76.84 26.45,74.015 26.45,33.24 28.44,31.25 SENS5.2@37.5,31.25
ADC1_6: SENS6.2 U4.10 | length 58.5
  L1 (Signal) w0.2: v2(24.357,60.753) 24.357,48.013 26.12,46.25 SENS6.2@37.5,46.25 ; v2(38.735,77.343) 38.735,77.235 39.067,76.903 U4.10@39.067,74.949
  L4 (Signal) w0.2: v2(24.357,60.753) 25.25,61.645 25.25,74.512 28.778,78.04 38.038,78.04 v2(38.735,77.343)
ADC1_7: SENS7.2 U4.11 | length 42.9
  L1 (Signal) w0.2: v2(25.375,60.335) 36.585,60.335 SENS7.2@37.5,61.25 ; v2(37.635,77.343) 37.635,77.235 38.567,76.303 U4.11@38.567,74.949
  L4 (Signal) w0.2: v2(25.375,60.335) 25.375,60.377 25.65,60.652 25.65,74.347 28.943,77.64 37.318,77.64 37.615,77.343 v2(37.635,77.343)
ADC2_0: SENS8.2 U4.24 | length 64.6
  L1 (Signal) w0.254: v2(36.576,68.199) 36.582,68.205 36.582,68.685 36.731,68.834 U4.24@37.452,68.834
  L4 (Signal) w0.2: v2(36.576,68.199) 36.521,68.144 34.997,68.144 34.544,67.691 34.544,61.26 36.597,59.207 41.027,59.207 48.387,51.847 48.387,19.488 49.125,18.75 SENS8.2@52.5,18.75
ADC2_2: SENS9.2 U4.39 | length 48.3
  L1 (Signal) w0.2: U4.39@44.182,69.834 44.186,69.83 46.28,69.83 v2(46.925,70.475)
  L4 (Signal) w0.2: v2(46.925,70.475) 41.225,64.775 41.225,59.575 48.814,51.986 48.814,34.766 49.83,33.75 SENS9.2@52.5,33.75
ADC2_4: SENS10.2 U4.20 | length 38.2
  L1 (Signal) w0.2: v2(36.624,70.068) 36.7,70.145 36.7,70.472 37.037,70.809 37.427,70.809 U4.20@37.452,70.834 ; v2(42.96,55.63) 46.998,55.63 47.075,55.707 v2(47.183,55.707)
  L4 (Signal) w0.2: v2(36.624,70.068) 36.547,69.992 36.279,69.992 34.144,67.857 34.144,61.094 36.431,58.807 40.862,58.807 42.96,56.709 v2(42.96,55.63) ; v2(47.183,55.707) 48.093,55.707 49.95,53.85 49.95,49.575 50.775,48.75 SENS10.2@52.5,48.75
ADC2_5: SENS11.2 U4.18 | length 39.7
  L1 (Signal) w0.2: v2(35.828,71.155) 35.934,71.155 36.613,71.834 U4.18@37.452,71.834 ; v2(41.73,56.52) 41.76,56.55 45.69,56.55 v2(45.72,56.58)
  L4 (Signal) w0.2: v2(35.828,71.155) 35.828,70.372 33.655,68.199 33.655,61.018 36.266,58.407 40.696,58.407 41.73,57.373 v2(41.73,56.52) ; v2(45.72,56.58) 47.97,56.58 49.9,58.51 49.9,62.85 50.8,63.75 SENS11.2@52.5,63.75
ADC2_6: SENS12.2 U4.17 | length 109.4
  L1 (Signal) w0.2: v2(35.819,72.255) 35.927,72.255 36.006,72.334 U4.17@37.452,72.334 ; v2(39.497,51.943) 40.132,52.578 65.036,52.578 67.691,49.923 67.691,16.383 68.326,15.748 79.248,15.748 80.391,14.605 80.391,9.227 79.914,8.75 SENS12.2@78.75,8.75
  L4 (Signal) w0.2: v2(35.819,72.255) 35.052,71.488 35.052,70.358 33.18,68.486 33.18,60.927 39.497,54.61 v2(39.497,51.943)
ADC2_7: SENS13.2 U4.16 | length 94.5
  L1 (Signal) w0.2: v2(34.442,71.637) 34.442,71.745 35.552,72.855 36.371,72.855 36.392,72.834 U4.16@37.452,72.834 ; v2(38.354,52.324) 39.008,52.978 65.201,52.978 68.199,49.98 68.199,25.273 69.189,24.283 77.863,24.283 78.396,23.75 SENS13.2@78.75,23.75
  L4 (Signal) w0.2: v2(34.442,71.637) 33.087,71.637 32.701,71.251 32.701,60.84 38.989,54.552 38.989,52.959 v2(38.354,52.324)
ADC2_8: SENS14.2 U4.14 | length 81.3
  L1 (Signal) w0.2: v2(34.326,73.833) U4.14@37.451,73.834 ; v2(37.65,53.384) 65.361,53.384 68.707,50.038 68.707,39.878 69.835,38.75 SENS14.2@78.75,38.75
  L4 (Signal) w0.2: v2(34.326,73.833) 32.283,73.833 31.901,73.451 31.901,60.428 37.719,54.61 37.719,53.453 v2(37.65,53.384)
ADC2_9: SENS15.2 U4.15 | length 66.8
  L1 (Signal) w0.2: v2(34.412,72.736) 35.01,73.334 U4.15@37.452,73.334 ; v2(38.354,54.229) 38.799,53.784 78.716,53.784 SENS15.2@78.75,53.75
  L4 (Signal) w0.2: v2(34.412,72.736) 32.686,72.736 32.301,72.351 32.301,60.675 38.277,54.698 38.277,54.306 v2(38.354,54.229)
Data_N: U1.1 U2.5 USB.A7 USB.B7 | length 33.3
  L1 (Signal) w0.286: v2(3.822,80.522) 3.809,80.536 3.809,80.968 3.382,81.394 3.382,82.037 3.929,82.583 5.877,82.583 6.789,82.583 USB.B7@6.795,82.589 6.802,82.582 7.507,82.582 7.708,82.381 7.708,81.797 7.507,81.596 6.802,81.596 USB.A7@6.795,81.589 ; U1.1@14.035,73.625 14.085,73.675 15.5,73.675 v2(15.55,73.725) ; U2.5@19.744,68.948 19.749,68.953 19.749,70.494 20.13,70.875 20.13,71.45 19.825,71.756 v2(19.825,71.775)
  L4 (Signal) w0.286: v2(3.822,80.522) 3.836,80.509 4.268,80.509 4.665,80.111 8.014,80.111 14.095,74.03 15.225,74.03 15.531,73.725 v2(15.55,73.725) 15.569,73.725 15.875,74.03 18.601,74.03 20.13,72.501 20.13,72.1 19.825,71.794 v2(19.825,71.775)
Data_P: U1.3 U2.4 USB.A6 USB.B6 | length 31.8
  L1 (Signal) w0.286: v2(4.6,81.3) 4.586,81.314 4.155,81.314 3.871,81.597 3.871,81.834 4.131,82.094 6.08,82.094 6.789,82.094 USB.A6@6.795,82.089 ; 6.083,82.082 5.882,81.881 5.882,81.297 6.083,81.096 6.788,81.096 USB.B6@6.795,81.089 ; U1.3@14.035,74.925 14.085,74.875 15.5,74.875 v2(15.55,74.825) ; U2.4@20.244,68.948 20.238,68.953 20.238,70.291 20.62,70.672 20.62,71.45 20.925,71.756 v2(20.925,71.775)
  L4 (Signal) w0.286: v2(4.6,81.3) 4.614,81.286 4.614,80.855 4.868,80.6 8.217,80.6 14.297,74.52 15.225,74.52 15.531,74.825 v2(15.55,74.825) 15.569,74.825 15.875,74.52 18.803,74.52 20.62,72.703 20.62,72.1 20.925,71.794 v2(20.925,71.775)
EN: C6.2 Q2.4 R11.1 U4.9 | length 22.3
  L1 (Signal) w0.2: C6.2@38.608,79.629 R11.1@39.497,79.629 39.566,79.56 v2(39.566,78.659) ; U4.9@39.567,74.949 39.566,78.615 v2@39.588,78.637
  L1 (Signal) w0.254: Q2.4@29.46,71.912 29.46,76.485 29.661,76.686 v2(29.661,78.64)
  L4 (Signal) w0.2: v2(29.661,78.64) 29.67,78.65 39.556,78.65 v2(39.566,78.659)